# EAGLE board Qwiic_Quad_Relay-Panel (EAGLE 9.5.2), part 1 of 2
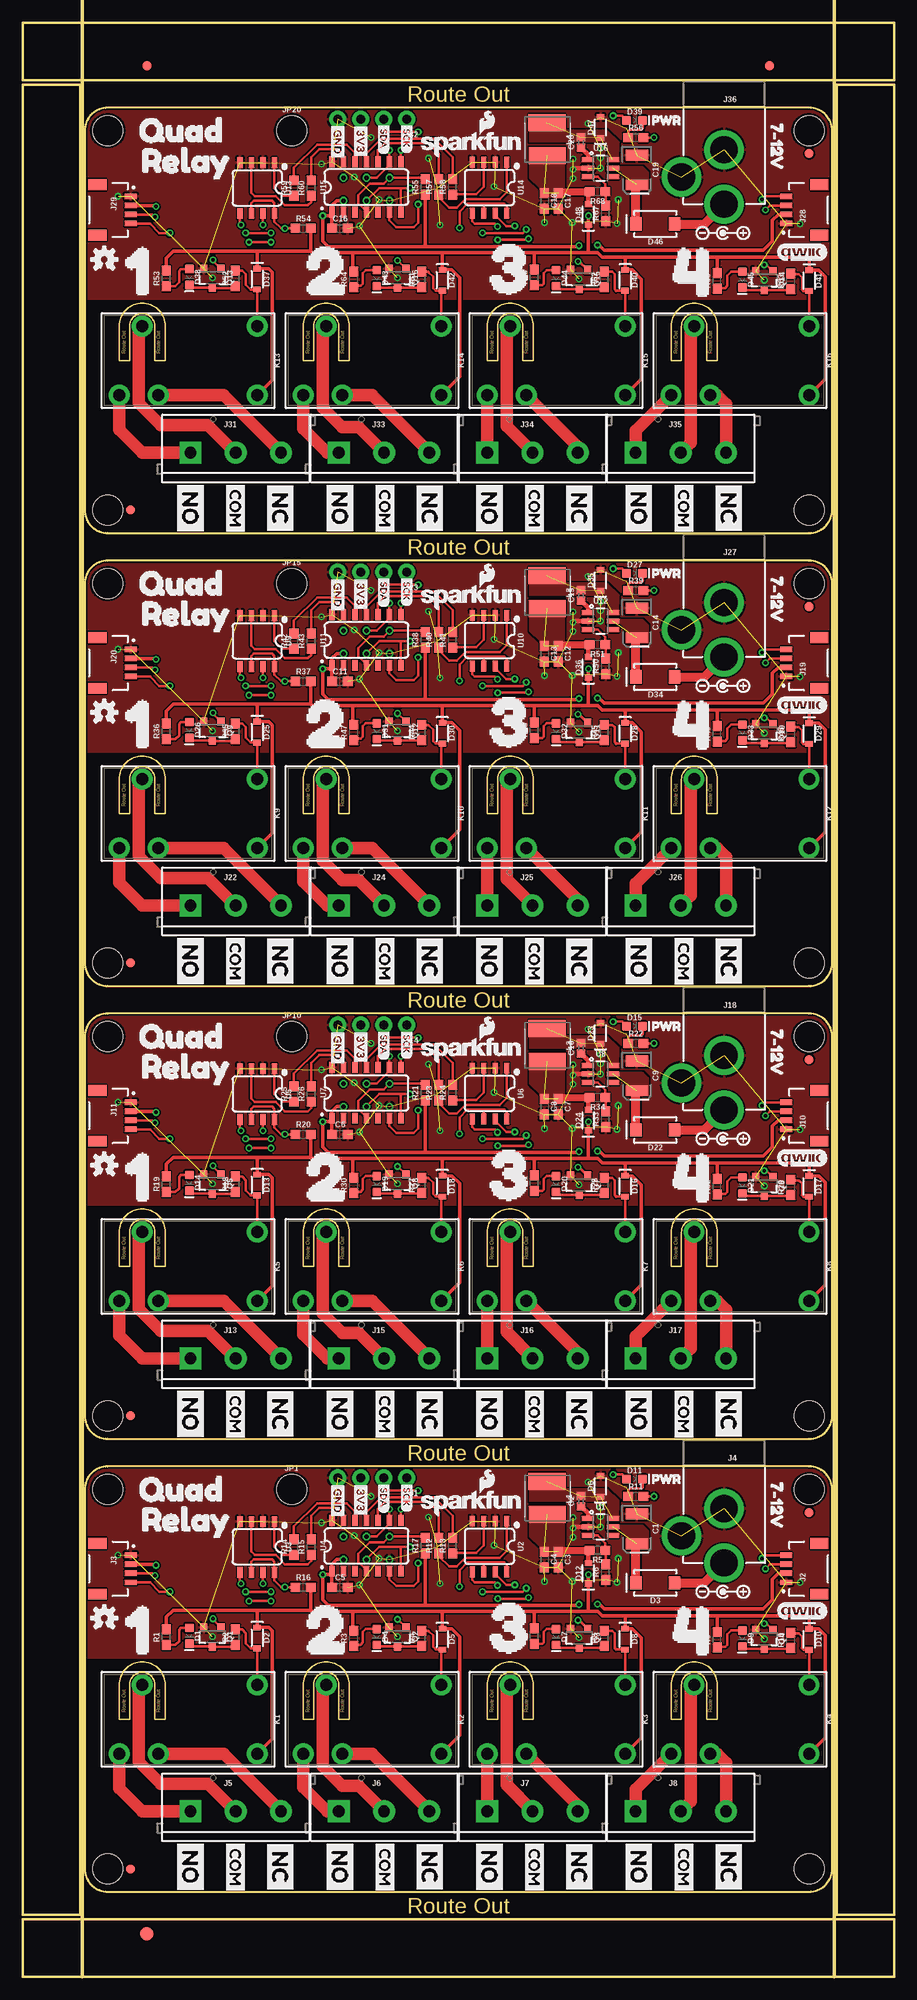
[diagram p0: board, top side]
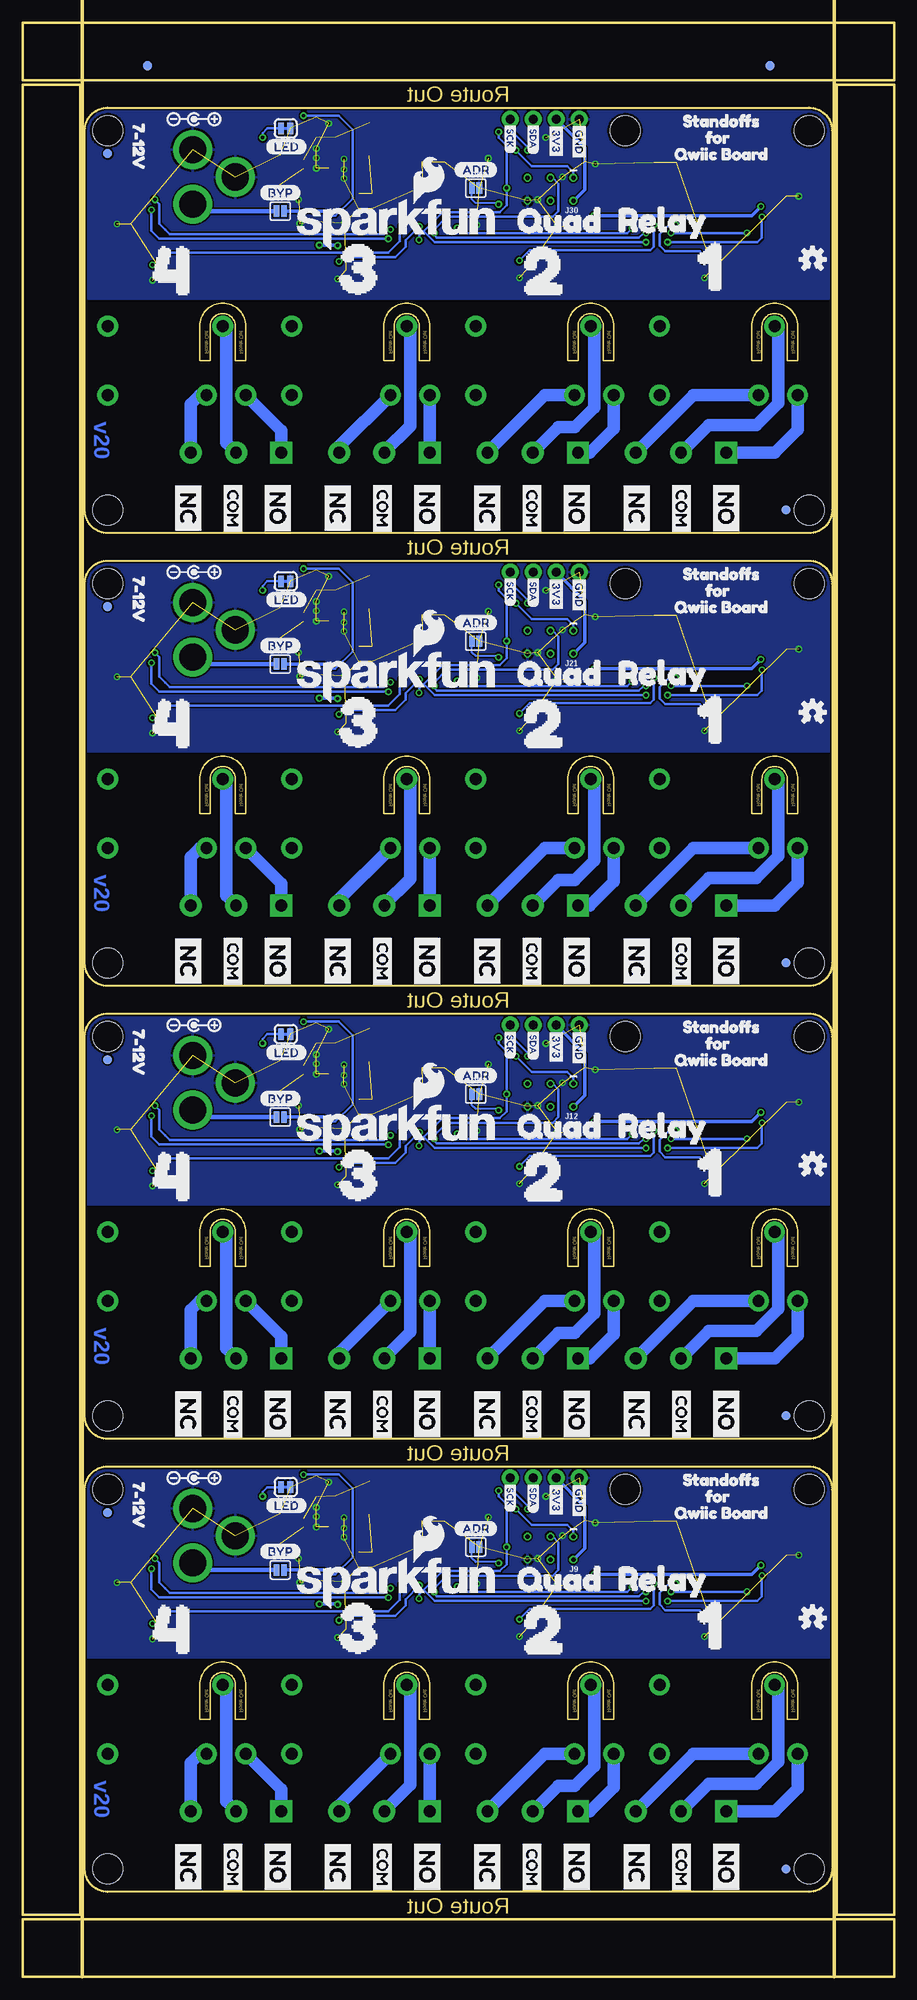
[diagram p1: board, bottom side, seen from below]

Size 96.27 x 215.9 mm. Coordinates in mm from the lower left corner, seen from the top.
Outline: 86.87,56.39 9.4,56.39 arc90 6.86,53.85 6.86,11.94 arc90 9.4,9.4 86.87,9.4 arc90 89.41,11.94 89.41,53.85 arc90 86.87,56.39
Outline: 34.92,28.45 34.92,32.26 arc90 33.53,33.66 arc90 32.13,32.26 32.13,28.45 30.99,28.45 30.99,32.26 arc-90 33.53,34.8 arc-90 36.07,32.26 36.07,28.45 34.92,28.45
Outline: 14.61,28.45 14.61,32.26 arc90 13.21,33.66 arc90 11.81,32.26 11.81,28.45 10.67,28.45 10.67,32.26 arc-90 13.21,34.8 arc-90 15.75,32.26 15.75,28.45 14.61,28.45
Outline: 55.24,28.45 55.24,32.26 arc90 53.85,33.66 arc90 52.45,32.26 52.45,28.45 51.31,28.45 51.31,32.26 arc-90 53.85,34.8 arc-90 56.39,32.26 56.39,28.45 55.24,28.45
Outline: 75.56,28.45 75.56,32.26 arc90 74.17,33.66 arc90 72.77,32.26 72.77,28.45 71.63,28.45 71.63,32.26 arc-90 74.17,34.8 arc-90 76.71,32.26 76.71,28.45 75.56,28.45
Outline: 86.87,106.43 9.4,106.43 arc90 6.86,103.89 6.86,61.98 arc90 9.4,59.44 86.87,59.44 arc90 89.41,61.98 89.41,103.89 arc90 86.87,106.43
Outline: 34.92,78.49 34.92,82.3 arc90 33.53,83.69 arc90 32.13,82.3 32.13,78.49 30.99,78.49 30.99,82.3 arc-90 33.53,84.84 arc-90 36.07,82.3 36.07,78.49 34.92,78.49
Outline: 14.61,78.49 14.61,82.3 arc90 13.21,83.69 arc90 11.81,82.3 11.81,78.49 10.67,78.49 10.67,82.3 arc-90 13.21,84.84 arc-90 15.75,82.3 15.75,78.49 14.61,78.49
Outline: 55.24,78.49 55.24,82.3 arc90 53.85,83.69 arc90 52.45,82.3 52.45,78.49 51.31,78.49 51.31,82.3 arc-90 53.85,84.84 arc-90 56.39,82.3 56.39,78.49 55.24,78.49
Outline: 75.56,78.49 75.56,82.3 arc90 74.17,83.69 arc90 72.77,82.3 72.77,78.49 71.63,78.49 71.63,82.3 arc-90 74.17,84.84 arc-90 76.71,82.3 76.71,78.49 75.56,78.49
Outline: 86.87,156.46 9.4,156.46 arc90 6.86,153.92 6.86,112.01 arc90 9.4,109.47 86.87,109.47 arc90 89.41,112.01 89.41,153.92 arc90 86.87,156.46
Outline: 34.92,128.52 34.92,132.33 arc90 33.53,133.73 arc90 32.13,132.33 32.13,128.52 30.99,128.52 30.99,132.33 arc-90 33.53,134.87 arc-90 36.07,132.33 36.07,128.52 34.92,128.52
Outline: 14.61,128.52 14.61,132.33 arc90 13.21,133.73 arc90 11.81,132.33 11.81,128.52 10.67,128.52 10.67,132.33 arc-90 13.21,134.87 arc-90 15.75,132.33 15.75,128.52 14.61,128.52
Outline: 55.24,128.52 55.24,132.33 arc90 53.85,133.73 arc90 52.45,132.33 52.45,128.52 51.31,128.52 51.31,132.33 arc-90 53.85,134.87 arc-90 56.39,132.33 56.39,128.52 55.24,128.52
Outline: 75.56,128.52 75.56,132.33 arc90 74.17,133.73 arc90 72.77,132.33 72.77,128.52 71.63,128.52 71.63,132.33 arc-90 74.17,134.87 arc-90 76.71,132.33 76.71,128.52 75.56,128.52
Outline: 86.87,206.5 9.4,206.5 arc90 6.86,203.96 6.86,162.05 arc90 9.4,159.51 86.87,159.51 arc90 89.41,162.05 89.41,203.96 arc90 86.87,206.5
Outline: 34.92,178.56 34.92,182.37 arc90 33.53,183.77 arc90 32.13,182.37 32.13,178.56 30.99,178.56 30.99,182.37 arc-90 33.53,184.91 arc-90 36.07,182.37 36.07,178.56 34.92,178.56
Outline: 14.61,178.56 14.61,182.37 arc90 13.21,183.77 arc90 11.81,182.37 11.81,178.56 10.67,178.56 10.67,182.37 arc-90 13.21,184.91 arc-90 15.75,182.37 15.75,178.56 14.61,178.56
Outline: 55.24,178.56 55.24,182.37 arc90 53.85,183.77 arc90 52.45,182.37 52.45,178.56 51.31,178.56 51.31,182.37 arc-90 53.85,184.91 arc-90 56.39,182.37 56.39,178.56 55.24,178.56
Outline: 75.56,178.56 75.56,182.37 arc90 74.17,183.77 arc90 72.77,182.37 72.77,178.56 71.63,178.56 71.63,182.37 arc-90 74.17,184.91 arc-90 76.71,182.37 76.71,178.56 75.56,178.56
Outline: 0,6.35 96.27,6.35 96.27,0 0,0 0,6.35
Outline: 89.92,209.04 96.27,209.04 96.27,6.86 89.92,6.86 89.92,209.04
Outline: 0,215.9 96.27,215.9 96.27,209.55 0,209.55 0,215.9
Outline: 0,209.04 6.35,209.04 6.35,6.86 0,6.86 0,209.04
Copper layers (1*16): Top 0.035mm / dielectric 1.5mm / Bottom 0.035mm
Design rules "Qwiic_Quad_Relay": minimum track width 7mil, minimum drill 15mil, track to track 7mil, track to pad 7mil, pad to pad 7mil, via to via 7mil, smd to smd 7mil, copper to edge 7mil, drill to drill 7mil, minimum pad ring 7mil, minimum via ring 7mil, stop-mask expansion 4mil, vias tented up to drill 25mil, thermal gap 10mil
Milling: 2 lines

## Footprints (pad centres in the part's own frame; a part is rotated, then mirrored left to right if it is on the bottom)
SMT-JUMPER_2_NO_SILK = smd 0.635 x 1.27: 1 -0.406,0; 2 0.406,0
EIA3528 = smd 1.2 x 2.5: A 1.65,0; C -1.65,0
0402 = smd 0.85 x 0.9: 1 -0.58,0; 2 0.58,0
0603 = smd 1.1 x 1: 1 -0.85,0; 2 0.85,0
LED-0603 = smd 1 x 1: A -0.877,0; C 0.877,0
SOD-323 = smd 0.63 x 0.83: A 1.15,0; C -1.15,0
SMA-DIODE = smd 1.27 x 1.47: A -2.15,0; C 2.15,0
FIDUCIAL-1X2 = smd 1 x 1: 1 0,0
FIDUCIAL-1.5X3 = smd 1.5 x 1.5: 1 0,0
1X04_NO_SILK = drill 1.016 pad 1.88: 1 0,0; 2 2.54,0; 3 5.08,0; 4 7.62,0
JST04_1MM_RA = smd 0.6 x 1.35: 1 -1.5,0; 2 -0.5,0; 3 0.5,0; 4 1.5,0 | smd 1.2 x 2: NC1 2.8,-3.675; NC2 -2.8,-3.675
POWER_JACK_PTH = drill 2.997 pad 4.318: GND 0,7.7; GNDBREAK 4.7,10.7; PWR 0,13.7
SCREWTERMINAL-5MM-3 = drill 1.3 pad 2.413 square: 1 0,0 | drill 1.3 pad 2.413: 2 5,0; 3 10,0
2X3_TEST_POINTS = drill 0.508: 1 -2.54,-1.27; 2 -2.54,1.27; 3 0,-1.27; 4 0,1.27; 5 2.54,-1.27; 6 2.54,1.27
STAND-OFF = hole 3.302: 0,0
RELAY-JZC = drill 1.3 pad 2.286: 1 3.81,-8.89; 2 -3.81,2.032; 3 -3.81,6.35; 4 3.81,3.81; 5 -3.81,-8.89
INDUCTOR_15UH = smd 1.85 x 4.1: P1 -1.905,0; P2 1.745,0.05
SMT-JUMPER_2_NC_TRACE_SILK = smd 0.66 x 1.27: 1 -0.521,0; 2 0.521,0
SOT23-3 = smd 0.8 x 0.9: 1 -0.95,-1; 2 0.95,-1; 3 0,1.1
SOT23-6 = smd 0.55 x 1.35: 1 -0.95,-1.375; 2 0,-1.375; 3 0.95,-1.375; 4 0.95,1.375; 5 0,1.375; 6 -0.95,1.375
SO08 = smd 0.6 x 1.2: 1 -1.905,-2.8; 2 -0.635,-2.8; 3 0.635,-2.8; 4 1.905,-2.8; 5 1.905,2.8; 6 0.635,2.8; 7 -0.635,2.8; 8 -1.905,2.8
SO14 = smd 0.6 x 1.2: 1 -3.81,-2.8; 2 -2.54,-2.8; 3 -1.27,-2.8; 4 0,-2.8; 5 1.27,-2.8; 6 2.54,-2.8; 7 3.81,-2.8; 8 3.81,2.8; 9 2.54,2.8; 10 1.27,2.8; 11 0,2.8; 12 -1.27,2.8; 13 -2.54,2.8; 14 -3.81,2.8

## Placement (x,y rotation side)
ADR  JUMPER-SMT_2_NO_SILK  [SMT-JUMPER_2_NO_SILK]  46.23,47.5 0 bottom
ADR1  JUMPER-SMT_2_NO_SILK  [SMT-JUMPER_2_NO_SILK]  46.23,97.54 0 bottom
ADR2  JUMPER-SMT_2_NO_SILK  [SMT-JUMPER_2_NO_SILK]  46.23,147.57 0 bottom
ADR3  JUMPER-SMT_2_NO_SILK  [SMT-JUMPER_2_NO_SILK]  46.23,197.61 0 bottom
BYP  JUMPER-SMT_2_NO_SILK  [SMT-JUMPER_2_NO_SILK]  67.82,44.96 0 bottom
BYP1  JUMPER-SMT_2_NO_SILK  [SMT-JUMPER_2_NO_SILK]  67.82,95 0 bottom
BYP2  JUMPER-SMT_2_NO_SILK  [SMT-JUMPER_2_NO_SILK]  67.82,145.03 0 bottom
BYP3  JUMPER-SMT_2_NO_SILK  [SMT-JUMPER_2_NO_SILK]  67.82,195.07 0 bottom
C1  10uF  [EIA3528]  67.84,49.5 270 top
C2  0.1uF  [0402]  61.67,52.55 90 top
C3  10uF  [0603]  59.16,46.1 270 top
C4  10uF  [0603]  57.63,46.1 270 top
C5  0.1uF  [0603]  35.05,43.05 0 top
C6  0.1uF  [0603]  35.05,93.09 0 top
C7  10uF  [0603]  59.16,96.14 270 top
C8  10uF  [0603]  57.63,96.14 270 top
C9  10uF  [EIA3528]  67.84,99.54 270 top
C10  0.1uF  [0402]  61.67,102.59 90 top
C11  0.1uF  [0603]  35.05,143.13 0 top
C12  10uF  [0603]  59.16,146.18 270 top
C13  10uF  [0603]  57.63,146.18 270 top
C14  10uF  [EIA3528]  67.84,149.58 270 top
C15  0.1uF  [0402]  61.67,152.63 90 top
C16  0.1uF  [0603]  35.05,193.17 0 top
C17  10uF  [0603]  59.16,196.22 270 top
C18  10uF  [0603]  57.63,196.22 270 top
C19  10uF  [EIA3528]  67.84,199.62 270 top
C20  0.1uF  [0402]  61.67,202.67 90 top
D1  BLUE  [LED-0603]  18.41,37.68 270 top
D2  1A/23V/620mV  [SOD-323]  25.91,37.45 270 top
D3  1A/40V/500mV  [SMA-DIODE]  69.88,43.54 180 top
D4  BLUE  [LED-0603]  39.12,37.55 270 top
D5  1A/23V/620mV  [SOD-323]  46.35,37.32 270 top
D6  3A/10V/280mV  [SOD-323]  63.83,54.2 90 top
D7  BLUE  [LED-0603]  58.93,37.55 270 top
D8  1A/23V/620mV  [SOD-323]  66.55,37.32 270 top
D9  BLUE  [LED-0603]  79.5,37.4 270 top
D10  1A/23V/620mV  [SOD-323]  86.87,37.29 270 top
D11  RED  [LED-0603]  67.59,54.99 0 top
D12  3A/10V/280mV  [SOD-323]  62.48,44.58 90 top
D13  1A/23V/620mV  [SOD-323]  25.91,87.48 270 top
D14  BLUE  [LED-0603]  18.41,87.72 270 top
D15  RED  [LED-0603]  67.59,105.03 0 top
D16  1A/23V/620mV  [SOD-323]  66.55,87.36 270 top
D17  1A/23V/620mV  [SOD-323]  86.87,87.33 270 top
D18  1A/23V/620mV  [SOD-323]  46.35,87.36 270 top
D19  BLUE  [LED-0603]  39.12,87.59 270 top
D20  BLUE  [LED-0603]  58.93,87.59 270 top
D21  BLUE  [LED-0603]  79.5,87.43 270 top
D22  1A/40V/500mV  [SMA-DIODE]  69.88,93.57 180 top
D23  3A/10V/280mV  [SOD-323]  63.83,104.24 90 top
D24  3A/10V/280mV  [SOD-323]  62.48,94.61 90 top
D25  1A/23V/620mV  [SOD-323]  25.91,137.52 270 top
D26  BLUE  [LED-0603]  18.41,137.76 270 top
D27  RED  [LED-0603]  67.59,155.07 0 top
D28  1A/23V/620mV  [SOD-323]  66.55,137.4 270 top
D29  1A/23V/620mV  [SOD-323]  86.87,137.36 270 top
D30  1A/23V/620mV  [SOD-323]  46.35,137.4 270 top
D31  BLUE  [LED-0603]  39.12,137.63 270 top
D32  BLUE  [LED-0603]  58.93,137.63 270 top
D33  BLUE  [LED-0603]  79.5,137.47 270 top
D34  1A/40V/500mV  [SMA-DIODE]  69.88,143.61 180 top
D35  3A/10V/280mV  [SOD-323]  63.83,154.28 90 top
D36  3A/10V/280mV  [SOD-323]  62.48,144.65 90 top
D37  1A/23V/620mV  [SOD-323]  25.91,187.56 270 top
D38  BLUE  [LED-0603]  18.41,187.79 270 top
D39  RED  [LED-0603]  67.59,205.1 0 top
D40  1A/23V/620mV  [SOD-323]  66.55,187.43 270 top
D41  1A/23V/620mV  [SOD-323]  86.87,187.4 270 top
D42  1A/23V/620mV  [SOD-323]  46.35,187.43 270 top
D43  BLUE  [LED-0603]  39.12,187.67 270 top
D44  BLUE  [LED-0603]  58.93,187.67 270 top
D45  BLUE  [LED-0603]  79.5,187.51 270 top
D46  1A/40V/500mV  [SMA-DIODE]  69.88,193.65 180 top
D47  3A/10V/280mV  [SOD-323]  63.83,204.32 90 top
D48  3A/10V/280mV  [SOD-323]  62.48,194.69 90 top
E$1  [FIDUCIAL-1X2]  13.72,211.14 0 top
E$2  [FIDUCIAL-1X2]  13.72,211.14 0 bottom
E$3  [FIDUCIAL-1X2]  82.49,211.14 0 top
E$4  [FIDUCIAL-1X2]  82.49,211.14 0 bottom
E$5  [FIDUCIAL-1.5X3]  13.72,4.76 0 top
FD1  FIDUCIAL1X2  [FIDUCIAL-1X2]  86.87,51.31 0 bottom
FD2  FIDUCIAL1X2  [FIDUCIAL-1X2]  11.94,11.94 0 top
FD3  FIDUCIAL1X2  [FIDUCIAL-1X2]  11.94,11.94 0 bottom
FD4  FIDUCIAL1X2  [FIDUCIAL-1X2]  86.87,51.31 0 top
FD5  FIDUCIAL1X2  [FIDUCIAL-1X2]  86.87,101.35 0 bottom
FD6  FIDUCIAL1X2  [FIDUCIAL-1X2]  11.94,61.98 0 bottom
FD7  FIDUCIAL1X2  [FIDUCIAL-1X2]  11.94,61.98 0 top
FD8  FIDUCIAL1X2  [FIDUCIAL-1X2]  86.87,101.35 0 top
FD9  FIDUCIAL1X2  [FIDUCIAL-1X2]  86.87,151.38 0 bottom
FD10  FIDUCIAL1X2  [FIDUCIAL-1X2]  11.94,112.01 0 bottom
FD11  FIDUCIAL1X2  [FIDUCIAL-1X2]  11.94,112.01 0 top
FD12  FIDUCIAL1X2  [FIDUCIAL-1X2]  86.87,151.38 0 top
FD13  FIDUCIAL1X2  [FIDUCIAL-1X2]  86.87,201.42 0 bottom
FD14  FIDUCIAL1X2  [FIDUCIAL-1X2]  11.94,162.05 0 bottom
FD15  FIDUCIAL1X2  [FIDUCIAL-1X2]  11.94,162.05 0 top
FD16  FIDUCIAL1X2  [FIDUCIAL-1X2]  86.87,201.42 0 top
J1  [1X04_NO_SILK]  42.42,55.12 180 top
J2  Qwiic Right Angle  [JST04_1MM_RA]  84.33,45.08 90 top
J3  Qwiic Right Angle  [JST04_1MM_RA]  11.94,45.08 270 top
J4  POWER_JACK  [POWER_JACK_PTH]  77.47,59.44 180 top
J5  [SCREWTERMINAL-5MM-3]  18.54,18.29 0 top
J6  [SCREWTERMINAL-5MM-3]  34.92,18.29 0 top
J7  [SCREWTERMINAL-5MM-3]  51.31,18.29 0 top
J8  [SCREWTERMINAL-5MM-3]  67.69,18.29 0 top
J9  AVR_SPI_PROG_3X2TESTPOINTS  [2X3_TEST_POINTS]  37.97,47.37 180 bottom
J10  Qwiic Right Angle  [JST04_1MM_RA]  84.33,95.12 90 top
J11  Qwiic Right Angle  [JST04_1MM_RA]  11.94,95.12 270 top
J12  AVR_SPI_PROG_3X2TESTPOINTS  [2X3_TEST_POINTS]  37.97,97.41 180 bottom
J13  [SCREWTERMINAL-5MM-3]  18.54,68.33 0 top
J14  [1X04_NO_SILK]  42.42,105.16 180 top
J15  [SCREWTERMINAL-5MM-3]  34.92,68.33 0 top
J16  [SCREWTERMINAL-5MM-3]  51.31,68.33 0 top
J17  [SCREWTERMINAL-5MM-3]  67.69,68.33 0 top
J18  POWER_JACK  [POWER_JACK_PTH]  77.47,109.47 180 top
J19  Qwiic Right Angle  [JST04_1MM_RA]  84.33,145.16 90 top
J20  Qwiic Right Angle  [JST04_1MM_RA]  11.94,145.16 270 top
J21  AVR_SPI_PROG_3X2TESTPOINTS  [2X3_TEST_POINTS]  37.97,147.45 180 bottom
J22  [SCREWTERMINAL-5MM-3]  18.54,118.36 0 top
J23  [1X04_NO_SILK]  42.42,155.19 180 top
J24  [SCREWTERMINAL-5MM-3]  34.92,118.36 0 top
J25  [SCREWTERMINAL-5MM-3]  51.31,118.36 0 top
J26  [SCREWTERMINAL-5MM-3]  67.69,118.36 0 top
J27  POWER_JACK  [POWER_JACK_PTH]  77.47,159.51 180 top
J28  Qwiic Right Angle  [JST04_1MM_RA]  84.33,195.2 90 top
J29  Qwiic Right Angle  [JST04_1MM_RA]  11.94,195.2 270 top
J30  AVR_SPI_PROG_3X2TESTPOINTS  [2X3_TEST_POINTS]  37.97,197.48 180 bottom
J31  [SCREWTERMINAL-5MM-3]  18.54,168.4 0 top
J32  [1X04_NO_SILK]  42.42,205.23 180 top
J33  [SCREWTERMINAL-5MM-3]  34.92,168.4 0 top
J34  [SCREWTERMINAL-5MM-3]  51.31,168.4 0 top
J35  [SCREWTERMINAL-5MM-3]  67.69,168.4 0 top
J36  POWER_JACK  [POWER_JACK_PTH]  77.47,209.55 180 top
JP1  STAND-OFF  [STAND-OFF]  29.72,53.85 0 top
JP2  STAND-OFF  [STAND-OFF]  9.4,103.89 0 top
JP3  STAND-OFF  [STAND-OFF]  86.87,103.89 0 top
JP4  STAND-OFF  [STAND-OFF]  9.4,53.85 0 top
JP5  STAND-OFF  [STAND-OFF]  86.87,53.85 0 top
JP6  STAND-OFF  [STAND-OFF]  9.4,11.94 0 top
JP7  STAND-OFF  [STAND-OFF]  86.87,11.94 0 top
JP8  STAND-OFF  [STAND-OFF]  9.4,61.98 0 top
JP9  STAND-OFF  [STAND-OFF]  86.87,61.98 0 top
JP10  STAND-OFF  [STAND-OFF]  29.72,103.89 0 top
JP11  STAND-OFF  [STAND-OFF]  9.4,153.92 0 top
JP12  STAND-OFF  [STAND-OFF]  86.87,153.92 0 top
JP13  STAND-OFF  [STAND-OFF]  9.4,112.01 0 top
JP14  STAND-OFF  [STAND-OFF]  86.87,112.01 0 top
JP15  STAND-OFF  [STAND-OFF]  29.72,153.92 0 top
JP16  STAND-OFF  [STAND-OFF]  9.4,203.96 0 top
JP17  STAND-OFF  [STAND-OFF]  86.87,203.96 0 top
JP18  STAND-OFF  [STAND-OFF]  9.4,162.05 0 top
JP19  STAND-OFF  [STAND-OFF]  86.87,162.05 0 top
JP20  STAND-OFF  [STAND-OFF]  29.72,203.96 0 top
K1  RELAY-SPDT-JZC-11F  [RELAY-JZC]  17.02,28.45 90 top
K2  RELAY-SPDT-JZC-11F  [RELAY-JZC]  37.34,28.45 90 top
K3  RELAY-SPDT-JZC-11F  [RELAY-JZC]  57.66,28.45 90 top
K4  RELAY-SPDT-JZC-11F  [RELAY-JZC]  77.98,28.45 90 top
K5  RELAY-SPDT-JZC-11F  [RELAY-JZC]  17.02,78.49 90 top
K6  RELAY-SPDT-JZC-11F  [RELAY-JZC]  37.34,78.49 90 top
K7  RELAY-SPDT-JZC-11F  [RELAY-JZC]  57.66,78.49 90 top
K8  RELAY-SPDT-JZC-11F  [RELAY-JZC]  77.98,78.49 90 top
K9  RELAY-SPDT-JZC-11F  [RELAY-JZC]  17.02,128.52 90 top
K10  RELAY-SPDT-JZC-11F  [RELAY-JZC]  37.34,128.52 90 top
K11  RELAY-SPDT-JZC-11F  [RELAY-JZC]  57.66,128.52 90 top
K12  RELAY-SPDT-JZC-11F  [RELAY-JZC]  77.98,128.52 90 top
K13  RELAY-SPDT-JZC-11F  [RELAY-JZC]  17.02,178.56 90 top
K14  RELAY-SPDT-JZC-11F  [RELAY-JZC]  37.34,178.56 90 top
K15  RELAY-SPDT-JZC-11F  [RELAY-JZC]  57.66,178.56 90 top
K16  RELAY-SPDT-JZC-11F  [RELAY-JZC]  77.98,178.56 90 top
L1  15uH  [INDUCTOR_15UH]  57.91,52.83 270 top
L2  15uH  [INDUCTOR_15UH]  57.91,102.87 270 top
L3  15uH  [INDUCTOR_15UH]  57.91,152.91 270 top
L4  15uH  [INDUCTOR_15UH]  57.91,202.95 270 top
LED  JUMPER-SMT_2_NC_TRACE_SILK  [SMT-JUMPER_2_NC_TRACE_SILK]  67.21,54.1 180 bottom
LED1  JUMPER-SMT_2_NC_TRACE_SILK  [SMT-JUMPER_2_NC_TRACE_SILK]  67.21,104.14 180 bottom
LED2  JUMPER-SMT_2_NC_TRACE_SILK  [SMT-JUMPER_2_NC_TRACE_SILK]  67.21,154.18 180 bottom
LED3  JUMPER-SMT_2_NC_TRACE_SILK  [SMT-JUMPER_2_NC_TRACE_SILK]  67.21,204.22 180 bottom
LOGO1  SFE_LOGO_NAME_FLAME.1_INCH  [SFE_LOGO_NAME_FLAME_.1]  49.58,52.32 0 top
LOGO2  OSHW-LOGOS  [OSHW-LOGO-S]  9.02,39.62 0 top
LOGO3  OSHW-LOGOS  [OSHW-LOGO-S]  9.02,89.66 0 top
LOGO4  SFE_LOGO_NAME_FLAME.1_INCH  [SFE_LOGO_NAME_FLAME_.1]  49.58,102.36 0 top
LOGO5  OSHW-LOGOS  [OSHW-LOGO-S]  9.02,139.7 0 top
LOGO6  SFE_LOGO_NAME_FLAME.1_INCH  [SFE_LOGO_NAME_FLAME_.1]  49.58,152.4 0 top
LOGO7  OSHW-LOGOS  [OSHW-LOGO-S]  9.02,189.74 0 top
LOGO8  SFE_LOGO_NAME_FLAME.1_INCH  [SFE_LOGO_NAME_FLAME_.1]  49.58,202.44 0 top
Q1  600mA/40V  [SOT23-3]  20.95,37.59 180 top
Q2  600mA/40V  [SOT23-3]  41.4,37.59 180 top
Q3  600mA/40V  [SOT23-3]  61.47,37.47 180 top
Q4  600mA/40V  [SOT23-3]  81.92,37.34 180 top
Q5  600mA/40V  [SOT23-3]  20.95,87.63 180 top
Q6  600mA/40V  [SOT23-3]  81.92,87.38 180 top
Q7  600mA/40V  [SOT23-3]  61.47,87.5 180 top
Q8  600mA/40V  [SOT23-3]  41.4,87.63 180 top
Q9  600mA/40V  [SOT23-3]  20.95,137.67 180 top
Q10  600mA/40V  [SOT23-3]  81.92,137.41 180 top
Q11  600mA/40V  [SOT23-3]  61.47,137.54 180 top
Q12  600mA/40V  [SOT23-3]  41.4,137.67 180 top
Q13  600mA/40V  [SOT23-3]  20.95,187.71 180 top
Q14  600mA/40V  [SOT23-3]  81.92,187.45 180 top
Q15  600mA/40V  [SOT23-3]  61.47,187.58 180 top
Q16  600mA/40V  [SOT23-3]  41.4,187.71 180 top
R1  1k  [0603]  15.88,37.52 90 top
R2  33  [0603]  23.5,37.52 90 top
R3  1k  [0603]  36.58,37.4 90 top
R4  33  [0603]  44.07,37.4 90 top
R5  12k  [0603]  63.5,47.12 180 top
R6  2.0k  [0603]  64.39,44.7 90 top
R7  1k  [0603]  56.51,37.65 90 top
R8  33  [0603]  64.26,37.4 90 top
R9  1k  [0603]  76.71,37.24 90 top
R10  33  [0603]  84.84,37.18 90 top
R11  1k  [0603]  67.72,53.09 0 top
R12  100  [0603]  45.97,47.62 90 top
R13  100  [0603]  47.5,47.62 90 top
R14  100  [0603]  29.97,47.5 90 top
R15  100  [0603]  31.88,47.5 90 top
R16  330  [0603]  30.99,43.05 0 top
R17  10k  [0603]  44.45,47.62 90 top
R18  33  [0603]  23.5,87.56 90 top
R19  1k  [0603]  15.88,87.56 90 top
R20  330  [0603]  30.99,93.09 0 top
R21  10k  [0603]  44.45,97.66 90 top
R22  1k  [0603]  67.72,103.12 0 top
R23  100  [0603]  45.97,97.66 90 top
R24  100  [0603]  47.5,97.66 90 top
R25  100  [0603]  29.97,97.54 90 top
R26  100  [0603]  31.88,97.54 90 top
R27  33  [0603]  44.07,87.44 90 top
R28  33  [0603]  64.26,87.44 90 top
R29  33  [0603]  84.84,87.22 90 top
R30  1k  [0603]  36.58,87.44 90 top
R31  1k  [0603]  56.51,87.69 90 top
R32  1k  [0603]  76.71,87.28 90 top
R33  2.0k  [0603]  64.39,94.74 90 top
R34  12k  [0603]  63.5,97.16 180 top
R35  33  [0603]  23.5,137.6 90 top
R36  1k  [0603]  15.88,137.6 90 top
R37  330  [0603]  30.99,143.13 0 top
R38  10k  [0603]  44.45,147.7 90 top
R39  1k  [0603]  67.72,153.16 0 top
R40  100  [0603]  45.97,147.7 90 top
R41  100  [0603]  47.5,147.7 90 top
R42  100  [0603]  29.97,147.57 90 top
R43  100  [0603]  31.88,147.57 90 top
R44  33  [0603]  44.07,137.47 90 top
R45  33  [0603]  64.26,137.47 90 top
R46  33  [0603]  84.84,137.26 90 top
R47  1k  [0603]  36.58,137.47 90 top
R48  1k  [0603]  56.51,137.73 90 top
R49  1k  [0603]  76.71,137.32 90 top
R50  2.0k  [0603]  64.39,144.78 90 top
R51  12k  [0603]  63.5,147.19 180 top
R52  33  [0603]  23.5,187.64 90 top
R53  1k  [0603]  15.88,187.64 90 top
R54  330  [0603]  30.99,193.17 0 top
R55  10k  [0603]  44.45,197.74 90 top
R56  1k  [0603]  67.72,203.2 0 top
R57  100  [0603]  45.97,197.74 90 top
R58  100  [0603]  47.5,197.74 90 top
R59  100  [0603]  29.97,197.61 90 top
R60  100  [0603]  31.88,197.61 90 top
R61  33  [0603]  44.07,187.51 90 top
R62  33  [0603]  64.26,187.51 90 top
R63  33  [0603]  84.84,187.3 90 top
R64  1k  [0603]  36.58,187.51 90 top
R65  1k  [0603]  56.51,187.77 90 top
R66  1k  [0603]  76.71,187.35 90 top
R67  2.0k  [0603]  64.39,194.82 90 top
R68  12k  [0603]  63.5,197.23 180 top
U1  LMR14010A  [SOT23-6]  63.83,49.71 270 top
U2  DUAL-OPTOISOLATOR_SOIC8  [SO08]  51.56,47.55 180 top
U3  DUAL-OPTOISOLATOR_SOIC8  [SO08]  25.91,47.5 180 top
U4  ATTINY84-ARDUINO  [SO14]  37.97,47.62 0 top
U5  DUAL-OPTOISOLATOR_SOIC8  [SO08]  25.91,97.54 180 top
U6  DUAL-OPTOISOLATOR_SOIC8  [SO08]  51.56,97.59 180 top
U7  ATTINY84-ARDUINO  [SO14]  37.97,97.66 0 top
U8  LMR14010A  [SOT23-6]  63.83,99.75 270 top
U9  DUAL-OPTOISOLATOR_SOIC8  [SO08]  25.91,147.57 180 top
U10  DUAL-OPTOISOLATOR_SOIC8  [SO08]  51.56,147.62 180 top
U11  ATTINY84-ARDUINO  [SO14]  37.97,147.7 0 top
U12  LMR14010A  [SOT23-6]  63.83,149.78 270 top
U13  DUAL-OPTOISOLATOR_SOIC8  [SO08]  25.91,197.61 180 top
U14  DUAL-OPTOISOLATOR_SOIC8  [SO08]  51.56,197.66 180 top
U15  ATTINY84-ARDUINO  [SO14]  37.97,197.74 0 top
U16  LMR14010A  [SOT23-6]  63.83,199.82 270 top
U$1  [7#12V0]  83.31,55.75 270 top
U$2  [20]  26.8,38.35 0 top
U$3  [10]  6.73,38.35 0 top
U$4  [30]  46.99,38.61 0 top
U$5  [40]  67.18,38.23 0 top
U$6  [QUAD0]  10.52,53.9 0 top
U$7  [RELAY0]  10.9,50.55 0 top
U$8  [SCK-[)-03]  42.42,54.74 270 top
U$9  [GND-03]  34.8,54.74 270 top
U$10  [3V3-03]  37.34,54.74 270 top
U$11  [SDA0]  39.88,54.74 270 top
U$12  [3V3-03]  37.34,54.74 270 bottom
U$13  [OSHW-LOGO-S]  9.02,39.62 0 bottom
U$14  [BYP]  70.1,46.99 0 bottom
U$15  [NO0]  18.54,15.62 270 top
U$16  [COM0]  23.5,15.37 270 top
U$17  [NC0]  28.45,15.49 270 top
U$18  [NO0]  35.05,15.62 270 top
U$19  [COM0]  40,15.37 270 top
U$20  [NC0]  44.96,15.49 270 top
U$21  [NO0]  51.56,15.62 270 top
U$22  [COM0]  56.51,15.37 270 top
U$23  [NC0]  61.47,15.49 270 top
U$24  [NO0]  68.07,15.62 270 top
U$25  [COM0]  73.03,15.37 270 top
U$26  [NC0]  77.98,15.49 270 top
U$27  [NO0]  51.56,15.62 270 bottom
U$28  [COM0]  73.03,15.37 270 bottom
U$29  [NC0]  77.98,15.49 270 bottom
U$30  [NO0]  68.07,15.62 270 bottom
U$31  [COM0]  56.51,15.37 270 bottom
U$32  [NC0]  61.47,15.49 270 bottom
U$33  [NO0]  35.05,15.62 270 bottom
U$34  [COM0]  40,15.37 270 bottom
U$35  [NC0]  44.96,15.49 270 bottom
U$36  [NO0]  18.54,15.62 270 bottom
U$37  [COM0]  23.5,15.37 270 bottom
U$38  [NC0]  28.45,15.49 270 bottom
U$39  [10]  26.29,38.86 0 bottom
U$40  [20]  45.47,38.35 0 bottom
U$41  [30]  65.91,38.61 0 bottom
U$42  [40]  86.49,38.38 0 bottom
U$43  [QUAD0]  43.99,43.94 0 bottom
U$44  [RELAY0]  32.72,43.99 0 bottom
U$45  [GND-03]  34.8,54.74 270 bottom
U$46  [PWR_TO]  68.58,54.99 0 top
U$47  [SDA0]  39.88,54.74 270 bottom
U$48  [SCK-[)-03]  42.42,54.74 270 bottom
U$49  [7#12V0]  83.44,55.75 270 bottom
U$50  [STANDOFFS0]  24.49,54.91 0 bottom
U$51  [POLARITY_MARKING_CENTER_POSITIVE#JPG]  77.34,42.55 0 top
U$52  [FOR1]  22,53.09 0 bottom
U$53  [LED]  69.44,52.07 0 bottom
U$54  [POLARITY_MARKING_CENTER_POSITIVE#JPG]  77.34,55.12 0 bottom
U$55  [QWIIC_5.5MM]  86.11,40.44 0 top
U$56  [ADR-()-04]  48.64,49.53 0 bottom
U$57  [SFE_LOGO_NAME_FLAME_.2]  54.97,43.54 0 bottom
U$58  [QWIIC_BOARD2]  25.4,51.26 0 bottom
U$59  [20]  26.8,88.39 0 top
U$60  [10]  6.73,88.39 0 top
U$61  [30]  46.99,88.65 0 top
U$62  [40]  67.18,88.27 0 top
U$63  [RELAY0]  10.9,100.58 0 top
U$64  [NO0]  18.54,65.66 270 top
U$65  [COM0]  23.5,65.41 270 top
U$66  [NC0]  28.45,65.53 270 top
U$67  [NO0]  35.05,65.66 270 top
U$68  [COM0]  40,65.41 270 top
U$69  [NC0]  44.96,65.53 270 top
U$70  [NO0]  51.56,65.66 270 top
U$71  [COM0]  56.51,65.41 270 top
U$72  [NC0]  61.47,65.53 270 top
U$73  [NO0]  68.07,65.66 270 top
U$74  [COM0]  73.03,65.41 270 top
U$75  [NC0]  77.98,65.53 270 top
U$76  [NO0]  51.56,65.66 270 bottom
U$77  [COM0]  73.03,65.41 270 bottom
U$78  [NC0]  77.98,65.53 270 bottom
U$79  [NO0]  68.07,65.66 270 bottom
U$80  [COM0]  56.51,65.41 270 bottom
U$81  [NC0]  61.47,65.53 270 bottom
U$82  [NO0]  35.05,65.66 270 bottom
U$83  [COM0]  40,65.41 270 bottom
U$84  [NC0]  44.96,65.53 270 bottom
U$85  [NO0]  18.54,65.66 270 bottom
U$86  [COM0]  23.5,65.41 270 bottom
U$87  [NC0]  28.45,65.53 270 bottom
U$88  [10]  26.29,88.9 0 bottom
U$89  [20]  45.47,88.39 0 bottom
U$90  [30]  65.91,88.65 0 bottom
U$91  [40]  86.49,88.42 0 bottom
U$92  [RELAY0]  32.72,94.03 0 bottom
U$93  [OSHW-LOGO-S]  9.02,89.66 0 bottom
U$94  [SCK-[)-03]  42.42,104.77 270 top
U$95  [GND-03]  34.8,104.77 270 top
U$96  [SDA0]  39.88,104.77 270 top
U$97  [GND-03]  34.8,104.77 270 bottom
U$98  [SDA0]  39.88,104.77 270 bottom
U$99  [SCK-[)-03]  42.42,104.77 270 bottom
U$100  [POLARITY_MARKING_CENTER_POSITIVE#JPG]  77.34,92.58 0 top
U$101  [POLARITY_MARKING_CENTER_POSITIVE#JPG]  77.34,105.16 0 bottom
U$102  [ADR-()-04]  48.64,99.57 0 bottom
U$103  [3V3-03]  37.34,104.77 270 top
U$104  [3V3-03]  37.34,104.77 270 bottom
U$105  [BYP]  70.1,97.03 0 bottom
U$106  [PWR_TO]  68.58,105.03 0 top
U$107  [7#12V0]  83.31,105.79 270 top
U$108  [7#12V0]  83.44,105.79 270 bottom
U$109  [QWIIC_5.5MM]  86.11,90.47 0 top
U$110  [QUAD0]  10.52,103.94 0 top
U$111  [QUAD0]  43.99,93.98 0 bottom
U$112  [LED]  69.44,102.11 0 bottom
U$113  [SFE_LOGO_NAME_FLAME_.2]  54.97,93.57 0 bottom
U$114  [STANDOFFS0]  24.49,104.95 0 bottom
U$115  [FOR1]  22,103.12 0 bottom
U$116  [QWIIC_BOARD2]  25.4,101.3 0 bottom
U$117  [20]  26.8,138.43 0 top
U$118  [10]  6.73,138.43 0 top
U$119  [30]  46.99,138.68 0 top
U$120  [40]  67.18,138.3 0 top
U$121  [RELAY0]  10.9,150.62 0 top
U$122  [NO0]  18.54,115.7 270 top
U$123  [COM0]  23.5,115.44 270 top
U$124  [NC0]  28.45,115.57 270 top
U$125  [NO0]  35.05,115.7 270 top
U$126  [COM0]  40,115.44 270 top
U$127  [NC0]  44.96,115.57 270 top
U$128  [NO0]  51.56,115.7 270 top
U$129  [COM0]  56.51,115.44 270 top
U$130  [NC0]  61.47,115.57 270 top
U$131  [NO0]  68.07,115.7 270 top
U$132  [COM0]  73.03,115.44 270 top
U$133  [NC0]  77.98,115.57 270 top
U$134  [NO0]  51.56,115.7 270 bottom
U$135  [COM0]  73.03,115.44 270 bottom
U$136  [NC0]  77.98,115.57 270 bottom
U$137  [NO0]  68.07,115.7 270 bottom
U$138  [COM0]  56.51,115.44 270 bottom
U$139  [NC0]  61.47,115.57 270 bottom
U$140  [NO0]  35.05,115.7 270 bottom
U$141  [COM0]  40,115.44 270 bottom
U$142  [NC0]  44.96,115.57 270 bottom
U$143  [NO0]  18.54,115.7 270 bottom
U$144  [COM0]  23.5,115.44 270 bottom
U$145  [NC0]  28.45,115.57 270 bottom
U$146  [10]  26.29,138.94 0 bottom
U$147  [20]  45.47,138.43 0 bottom
U$148  [30]  65.91,138.68 0 bottom
U$149  [40]  86.49,138.46 0 bottom
U$150  [RELAY0]  32.72,144.07 0 bottom
U$151  [OSHW-LOGO-S]  9.02,139.7 0 bottom
U$152  [SCK-[)-03]  42.42,154.81 270 top
U$153  [GND-03]  34.8,154.81 270 top
U$154  [SDA0]  39.88,154.81 270 top
U$155  [GND-03]  34.8,154.81 270 bottom
U$156  [SDA0]  39.88,154.81 270 bottom
U$157  [SCK-[)-03]  42.42,154.81 270 bottom
U$158  [POLARITY_MARKING_CENTER_POSITIVE#JPG]  77.34,142.62 0 top
U$159  [POLARITY_MARKING_CENTER_POSITIVE#JPG]  77.34,155.19 0 bottom
U$160  [ADR-()-04]  48.64,149.61 0 bottom
U$161  [3V3-03]  37.34,154.81 270 top
U$162  [3V3-03]  37.34,154.81 270 bottom
U$163  [BYP]  70.1,147.07 0 bottom
U$164  [PWR_TO]  68.58,155.07 0 top
U$165  [7#12V0]  83.31,155.83 270 top
U$166  [7#12V0]  83.44,155.83 270 bottom
U$167  [QWIIC_5.5MM]  86.11,140.51 0 top
U$168  [QUAD0]  10.52,153.97 0 top
U$169  [QUAD0]  43.99,144.02 0 bottom
U$170  [LED]  69.44,152.15 0 bottom
U$171  [SFE_LOGO_NAME_FLAME_.2]  54.97,143.61 0 bottom
U$172  [STANDOFFS0]  24.49,154.99 0 bottom
U$173  [FOR1]  22,153.16 0 bottom
U$174  [QWIIC_BOARD2]  25.4,151.33 0 bottom
U$175  [20]  26.8,188.47 0 top
U$176  [10]  6.73,188.47 0 top
U$177  [30]  46.99,188.72 0 top
U$178  [40]  67.18,188.34 0 top
U$179  [RELAY0]  10.9,200.66 0 top
U$180  [NO0]  18.54,165.73 270 top
U$181  [COM0]  23.5,165.48 270 top
U$182  [NC0]  28.45,165.61 270 top
U$183  [NO0]  35.05,165.73 270 top
U$184  [COM0]  40,165.48 270 top
U$185  [NC0]  44.96,165.61 270 top
U$186  [NO0]  51.56,165.73 270 top
U$187  [COM0]  56.51,165.48 270 top
U$188  [NC0]  61.47,165.61 270 top
U$189  [NO0]  68.07,165.73 270 top
U$190  [COM0]  73.03,165.48 270 top
U$191  [NC0]  77.98,165.61 270 top
U$192  [NO0]  51.56,165.73 270 bottom
U$193  [COM0]  73.03,165.48 270 bottom
U$194  [NC0]  77.98,165.61 270 bottom
U$195  [NO0]  68.07,165.73 270 bottom
U$196  [COM0]  56.51,165.48 270 bottom
U$197  [NC0]  61.47,165.61 270 bottom
U$198  [NO0]  35.05,165.73 270 bottom
U$199  [COM0]  40,165.48 270 bottom
U$200  [NC0]  44.96,165.61 270 bottom
U$201  [NO0]  18.54,165.73 270 bottom
U$202  [COM0]  23.5,165.48 270 bottom
U$203  [NC0]  28.45,165.61 270 bottom
U$204  [10]  26.29,188.98 0 bottom
U$205  [20]  45.47,188.47 0 bottom
U$206  [30]  65.91,188.72 0 bottom
U$207  [40]  86.49,188.5 0 bottom
U$208  [RELAY0]  32.72,194.11 0 bottom
U$209  [OSHW-LOGO-S]  9.02,189.74 0 bottom
U$210  [SCK-[)-03]  42.42,204.85 270 top
U$211  [GND-03]  34.8,204.85 270 top
U$212  [SDA0]  39.88,204.85 270 top
U$213  [GND-03]  34.8,204.85 270 bottom
U$214  [SDA0]  39.88,204.85 270 bottom
U$215  [SCK-[)-03]  42.42,204.85 270 bottom
U$216  [POLARITY_MARKING_CENTER_POSITIVE#JPG]  77.34,192.66 0 top
U$217  [POLARITY_MARKING_CENTER_POSITIVE#JPG]  77.34,205.23 0 bottom
U$218  [ADR-()-04]  48.64,199.64 0 bottom
U$219  [3V3-03]  37.34,204.85 270 top
U$220  [3V3-03]  37.34,204.85 270 bottom
U$221  [BYP]  70.1,197.1 0 bottom
U$222  [PWR_TO]  68.58,205.1 0 top
U$223  [7#12V0]  83.31,205.87 270 top
U$224  [7#12V0]  83.44,205.87 270 bottom
U$225  [QWIIC_5.5MM]  86.11,190.55 0 top
U$226  [QUAD0]  10.52,204.01 0 top
U$227  [QUAD0]  43.99,194.06 0 bottom
U$228  [LED]  69.44,202.18 0 bottom
U$229  [SFE_LOGO_NAME_FLAME_.2]  54.97,193.65 0 bottom
U$230  [STANDOFFS0]  24.49,205.03 0 bottom
U$231  [FOR1]  22,203.2 0 bottom
U$232  [QWIIC_BOARD2]  25.4,201.37 0 bottom

## Library data of the parts
ADR ADR1-ADR3 BYP BYP1-BYP3 LED LED1-LED3 = SparkFun-Jumpers
C1 C9 C14 C19 = SparkFun-Capacitors; PROD_ID: CAP-08063
C2 C10 C15 C20 = SparkFun-Capacitors; PROD_ID: CAP-15083
C3 C4 C7 C8 C12 C13 C17 C18 = SparkFun-Capacitors; PROD_ID: CAP-11015
C5 C6 C11 C16 = SparkFun-Capacitors; PROD_ID: CAP-00810
D1 D4 D7 D9 D14 D19-D21 D26 D31-D33 D38 D43-D45 = SparkFun-LED; PROD_ID: DIO-08575
D2 D5 D8 D10 D13 D16-D18 D25 D28-D30 D37 D40-D42 = SparkFun-DiscreteSemi; PROD_ID: DIO-11623
D3 D22 D34 D46 = SparkFun-DiscreteSemi; PROD_ID: DIO-08053
D6 D12 D23 D24 D35 D36 D47 D48 = SparkFun-DiscreteSemi; PROD_ID: DIO-14072
D11 D15 D27 D39 = SparkFun-LED; PROD_ID: DIO-00819
E$1-E$4 FD1-FD16 LOGO1-LOGO8 U$13 U$55 U$57 U$93 U$109 U$113 U$151 U$167 U$171 U$209 U$225 U$229 = SparkFun-Aesthetics
E$5 = SparkFun-Retired
J1 J9 J12 J14 J21 J23 J30 J32 = SparkFun-Connectors
J2 J3 J10 J11 J19 J20 J28 J29 = SparkFun-Connectors; PROD_ID: CONN-13694
J4 J18 J27 J36 = SparkFun-Connectors; PROD_ID: CONN-08197
J5-J8 J13 J15-J17 J22 J24-J26 J31 J33-J35 = SparkFun-Connectors; PROD_ID: CONN-10134; SF_SKU: PRT-08433
JP1-JP20 = SparkFun-Hardware
K1-K16 = SparkFun-Electromechanical; PROD_ID: COMP-09533; SF_SKU: COM-00100
L1-L4 = SparkFun-Coils; PROD_ID: NDUC-15090
Q1-Q16 = SparkFun-DiscreteSemi; PROD_ID: TRANS-08049
R1 R3 R7 R9 R11 R19 R22 R30-R32 R36 R39 R47-R49 R53 R56 R64-R66 = SparkFun-Resistors; PROD_ID: RES-07856
R2 R4 R8 R10 R18 R27-R29 R35 R44-R46 R52 R61-R63 = SparkFun-Resistors; PROD_ID: RES-08270
R5 R34 R51 R68 = SparkFun-Resistors; PROD_ID: RES-10327
R6 R33 R50 R67 = SparkFun-Resistors; PROD_ID: RES-08296
R12-R15 R23-R26 R40-R43 R57-R60 = SparkFun-Resistors; PROD_ID: RES-07863
R16 R20 R37 R54 = SparkFun-Resistors; PROD_ID: RES-00818
R17 R21 R38 R55 = SparkFun-Resistors; PROD_ID: RES-00824
U1 U8 U12 U16 = SparkFun-IC-Power; PROD_ID: IC-15089
U2 U3 U5 U6 U9 U10 U13 U14 = SparkFun-DiscreteSemi; PROD_ID: IC-09076
U4 U7 U11 U15 = SparkFun-IC-Microcontroller; PROD_ID: IC-14155
U$1 U$49 U$107 U$108 U$165 U$166 U$223 U$224 = POWER_IN
U$2 U$40 U$59 U$89 U$117 U$147 U$175 U$205 = 2
U$3 U$39 U$60 U$88 U$118 U$146 U$176 U$204 = 1
U$4 U$41 U$61 U$90 U$119 U$148 U$177 U$206 = 3
U$5 U$42 U$62 U$91 U$120 U$149 U$178 U$207 = 4
U$6 U$43 U$110 U$111 U$168 U$169 U$226 U$227 = Quad
U$7 U$44 U$63 U$92 U$121 U$150 U$179 U$208 = relay
U$8-U$10 U$12 U$45 U$48 U$56 U$94 U$95 U$97 U$99 U$102-U$104 U$152 U$153 U$155 U$157 U$160-U$162 U$210 U$211 U$213 U$215 U$218-U$220 = Labels
U$11 U$47 U$96 U$98 U$154 U$156 U$212 U$214 = SDA
U$14 U$46 U$53 U$105 U$106 U$112 U$163 U$164 U$170 U$221 U$222 U$228 = SparkFun-Buzzard
U$15 U$18 U$21 U$24 U$27 U$30 U$33 U$36 U$64 U$67 U$70 U$73 U$76 U$79 U$82 U$85 U$122 U$125 U$128 U$131 U$134 U$137 U$140 U$143 U$180 U$183 U$186 U$189 U$192 U$195 U$198 U$201 = NO
U$16 U$19 U$22 U$25 U$28 U$31 U$34 U$37 U$65 U$68 U$71 U$74 U$77 U$80 U$83 U$86 U$123 U$126 U$129 U$132 U$135 U$138 U$141 U$144 U$181 U$184 U$187 U$190 U$193 U$196 U$199 U$202 = COM
U$17 U$20 U$23 U$26 U$29 U$32 U$35 U$38 U$66 U$69 U$72 U$75 U$78 U$81 U$84 U$87 U$124 U$127 U$130 U$133 U$136 U$139 U$142 U$145 U$182 U$185 U$188 U$191 U$194 U$197 U$200 U$203 = NC
U$50 U$52 U$58 U$114-U$116 U$172-U$174 U$230-U$232 = standoff_text
U$51 U$54 U$100 U$101 U$158 U$159 U$216 U$217 = Polarity_marking_center_positive#jpg

## Nets
3.3V: C5.1 J1.3 J2.2 J3.2 J9.2 R17.1 U4.1
3.3V1: C6.1 J10.2 J11.2 J12.2 J14.3 R21.1 U7.1
3.3V2: C11.1 J19.2 J20.2 J21.2 J23.3 R38.1 U11.1
3.3V3: C16.1 J28.2 J29.2 J30.2 J32.3 R55.1 U15.1
5V: BYP.2 D2.C D5.C D8.C D10.C D11.A D12.C K1.5 K2.5 K3.5 K4.5 R1.2 R3.2 R7.2 R9.2 R16.2
5V1: BYP1.2 D13.C D15.A D16.C D17.C D18.C D24.C K5.5 K6.5 K7.5 K8.5 R19.2 R20.2 R30.2 R31.2 R32.2
5V2: BYP2.2 D25.C D27.A D28.C D29.C D30.C D36.C K9.5 K10.5 K11.5 K12.5 R36.2 R37.2 R47.2 R48.2 R49.2
5V3: BYP3.2 D37.C D39.A D40.C D41.C D42.C D48.C K13.5 K14.5 K15.5 K16.5 R53.2 R54.2 R64.2 R65.2 R66.2
5V_OUT: C3.1 C4.1 D12.A L1.P2 R5.2
5V_OUT1: C7.1 C8.1 D24.A L2.P2 R34.2
5V_OUT2: C12.1 C13.1 D36.A L3.P2 R51.2
5V_OUT3: C17.1 C18.1 D48.A L4.P2 R68.2
!RESET: J9.5 R17.2 U4.4
!RESET1: J12.5 R21.2 U7.4
!RESET2: J21.5 R38.2 U11.4
!RESET3: J30.5 R55.2 U15.4
ADDR_JUMP: ADR.1 U4.6
ADDR_JUMP1: ADR1.1 U7.6
ADDR_JUMP2: ADR2.1 U11.6
ADDR_JUMP3: ADR3.1 U15.6
CB: C2.1 U1.1
CB1: C10.1 U8.1
CB2: C15.1 U12.1
CB3: C20.1 U16.1
COM1: J5.2 K1.4
COM2: J6.2 K2.4
COM3: J7.2 K3.4
COM4: J8.2 K4.4
COM5: J13.2 K5.4
COM6: J15.2 K6.4
COM7: J16.2 K7.4
COM8: J17.2 K8.4
COM9: J22.2 K9.4
COM10: J24.2 K10.4
COM11: J25.2 K11.4
COM12: J26.2 K12.4
COM13: J31.2 K13.4
COM14: J33.2 K14.4
COM15: J34.2 K15.4
COM16: J35.2 K16.4
FB: R5.1 R6.2 U1.3
FB1: R33.2 R34.1 U8.3
FB2: R50.2 R51.1 U12.3
FB3: R67.2 R68.1 U16.3
GND: ADR.2 C1.C C3.2 C4.2 C5.2 D6.A J1.4 J2.1 J3.1 J4.GND J4.GNDBREAK J9.6 LED.1 Q1.2 Q2.2 Q3.2 Q4.2 R6.1 U1.2 U2.2 U2.4 U3.2 U3.4 U4.14
GND1: ADR1.2 C6.2 C7.2 C8.2 C9.C D23.A J10.1 J11.1 J12.6 J14.4 J18.GND J18.GNDBREAK LED1.1 Q5.2 Q6.2 Q7.2 Q8.2 R33.1 U5.2 U5.4 U6.2 U6.4 U7.14 U8.2
GND2: ADR2.2 C11.2 C12.2 C13.2 C14.C D35.A J19.1 J20.1 J21.6 J23.4 J27.GND J27.GNDBREAK LED2.1 Q9.2 Q10.2 Q11.2 Q12.2 R50.1 U9.2 U9.4 U10.2 U10.4 U11.14 U12.2
GND3: ADR3.2 C16.2 C17.2 C18.2 C19.C D47.A J28.1 J29.1 J30.6 J32.4 J36.GND J36.GNDBREAK LED3.1 Q13.2 Q14.2 Q15.2 Q16.2 R67.1 U13.2 U13.4 U14.2 U14.4 U15.14 U16.2
MISO: J9.1 U4.8
MISO1: J12.1 U7.8
MISO2: J21.1 U11.8
MISO3: J30.1 U15.8
N$1: D1.A R1.1
N$2: D1.C Q1.3 R2.1
N$3: R15.1 U3.3
N$4: D4.A R3.1
N$5: R14.1 U3.1
N$6: R16.1 U2.6 U2.8 U3.6 U3.8
N$7: D7.A R7.1
N$8: D9.A R9.1
N$9: R12.1 U2.1
N$10: D2.A K1.1 R2.2
N$11: R13.1 U2.3
N$12: D4.C Q2.3 R4.1
N$13: D11.C R11.1
N$14: LED.2 R11.2
N$15: D7.C Q3.3 R8.1
N$16: D14.C Q5.3 R18.1
N$17: D9.C Q4.3 R10.1
N$18: D5.A K2.1 R4.2
N$19: D15.C R22.1
N$20: R26.1 U5.3
N$21: R25.1 U5.1
N$22: R20.1 U5.6 U5.8 U6.6 U6.8
N$23: D8.A K3.1 R8.2
N$24: D10.A K4.1 R10.2
N$25: R23.1 U6.1
N$26: R24.1 U6.3
N$27: D19.C Q8.3 R27.1
N$28: D20.C Q7.3 R28.1
N$29: D21.C Q6.3 R29.1
N$30: D13.A K5.1 R18.2
N$31: D18.A K6.1 R27.2
N$32: D16.A K7.1 R28.2
N$33: D17.A K8.1 R29.2
N$34: LED1.2 R22.2
N$35: D14.A R19.1
N$36: D19.A R30.1
N$37: D20.A R31.1
N$38: D21.A R32.1
N$39: D26.C Q9.3 R35.1
N$40: D27.C R39.1
N$41: R43.1 U9.3
N$42: R42.1 U9.1
N$43: R37.1 U9.6 U9.8 U10.6 U10.8
N$44: R40.1 U10.1
N$45: R41.1 U10.3
N$46: D31.C Q12.3 R44.1
N$47: D32.C Q11.3 R45.1
N$48: D33.C Q10.3 R46.1
N$49: D25.A K9.1 R35.2
N$50: D30.A K10.1 R44.2
N$51: D28.A K11.1 R45.2
N$52: D29.A K12.1 R46.2
N$53: LED2.2 R39.2
N$54: D26.A R36.1
N$55: D31.A R47.1
N$56: D32.A R48.1
N$57: D33.A R49.1
N$58: D38.C Q13.3 R52.1
N$59: D39.C R56.1
N$60: R60.1 U13.3
N$61: R59.1 U13.1
N$62: R54.1 U13.6 U13.8 U14.6 U14.8
N$63: R57.1 U14.1
N$64: R58.1 U14.3
N$65: D43.C Q16.3 R61.1
N$66: D44.C Q15.3 R62.1
N$67: D45.C Q14.3 R63.1
N$68: D37.A K13.1 R52.2
N$69: D42.A K14.1 R61.2
N$70: D40.A K15.1 R62.2
N$71: D41.A K16.1 R63.2
N$72: LED3.2 R56.2
N$73: D38.A R53.1
N$74: D43.A R64.1
N$75: D44.A R65.1
N$76: D45.A R66.1
NC1: J5.3 K1.2
NC2: J6.3 K2.2
NC3: J7.3 K3.2
NC4: J8.3 K4.2
NC5: J13.3 K5.2
NC6: J15.3 K6.2
NC7: J16.3 K7.2
NC8: J17.3 K8.2
NC9: J22.3 K9.2
NC10: J24.3 K10.2
NC11: J25.3 K11.2
NC12: J26.3 K12.2
NC13: J31.3 K13.2
NC14: J33.3 K14.2
NC15: J34.3 K15.2
NC16: J35.3 K16.2
NO1: J5.1 K1.3
NO2: J6.1 K2.3
NO3: J7.1 K3.3
NO4: J8.1 K4.3
NO5: J13.1 K5.3
NO6: J15.1 K6.3
NO7: J16.1 K7.3
NO8: J17.1 K8.3
NO9: J22.1 K9.3
NO10: J24.1 K10.3
NO11: J25.1 K11.3
NO12: J26.1 K12.3
NO13: J31.1 K13.3
NO14: J33.1 K14.3
NO15: J34.1 K15.3
NO16: J35.1 K16.3
OPTO_1: Q1.1 U3.5
OPTO_2: Q2.1 U3.7
OPTO_3: Q3.1 U2.5
OPTO_4: Q4.1 U2.7
OPTO_5: Q5.1 U5.5
OPTO_6: Q8.1 U5.7
OPTO_7: Q7.1 U6.5
OPTO_8: Q6.1 U6.7
OPTO_9: Q9.1 U9.5
OPTO_10: Q12.1 U9.7
OPTO_11: Q11.1 U10.5
OPTO_12: Q10.1 U10.7
OPTO_13: Q13.1 U13.5
OPTO_14: Q16.1 U13.7
OPTO_15: Q15.1 U14.5
OPTO_16: Q14.1 U14.7
RELAY_CTRL1: R12.2 U4.10
RELAY_CTRL2: R13.2 U4.11
RELAY_CTRL3: R14.2 U4.12
RELAY_CTRL4: R15.2 U4.13
RELAY_CTRL5: R23.2 U7.10
RELAY_CTRL6: R24.2 U7.11
RELAY_CTRL7: R25.2 U7.12
RELAY_CTRL8: R26.2 U7.13
RELAY_CTRL9: R40.2 U11.10
RELAY_CTRL10: R41.2 U11.11
RELAY_CTRL11: R42.2 U11.12
RELAY_CTRL12: R43.2 U11.13
RELAY_CTRL13: R57.2 U15.10
RELAY_CTRL14: R58.2 U15.11
RELAY_CTRL15: R59.2 U15.12
RELAY_CTRL16: R60.2 U15.13
SCL/SCK: J1.1 J2.4 J3.4 J9.3 U4.9
SCL/SCK1: J10.4 J11.4 J12.3 J14.1 U7.9
SCL/SCK2: J19.4 J20.4 J21.3 J23.1 U11.9
SCL/SCK3: J28.4 J29.4 J30.3 J32.1 U15.9
SDA/MOSI: J1.2 J2.3 J3.3 J9.4 U4.7
SDA/MOSI1: J10.3 J11.3 J12.4 J14.2 U7.7
SDA/MOSI2: J19.3 J20.3 J21.4 J23.2 U11.7
SDA/MOSI3: J28.3 J29.3 J30.4 J32.2 U15.7
SW: C2.2 D6.C L1.P1 U1.6
SW1: C10.2 D23.C L2.P1 U8.6
SW2: C15.2 D35.C L3.P1 U12.6
SW3: C20.2 D47.C L4.P1 U16.6
VIN: BYP.1 D3.A J4.PWR
VIN1: BYP1.1 D22.A J18.PWR
VIN2: BYP2.1 D34.A J27.PWR
VIN3: BYP3.1 D46.A J36.PWR
VIN_DC_DC: C1.A D3.C U1.5
VIN_DC_DC1: C9.A D22.C U8.5
VIN_DC_DC2: C14.A D34.C U12.5
VIN_DC_DC3: C19.A D46.C U16.5